# Altium PCB BSPD v3.PcbDoc
Units mm, origin at the board's own origin, x right, y up, seen from the top; angles counter-clockwise.
Board outline 47 x 42 mm, 4 copper layers (Top Layer, 5V, GND, Bottom Layer), stack 0.603 mm thick; 41 components, 25 nets, 121 pads, 35 vias.
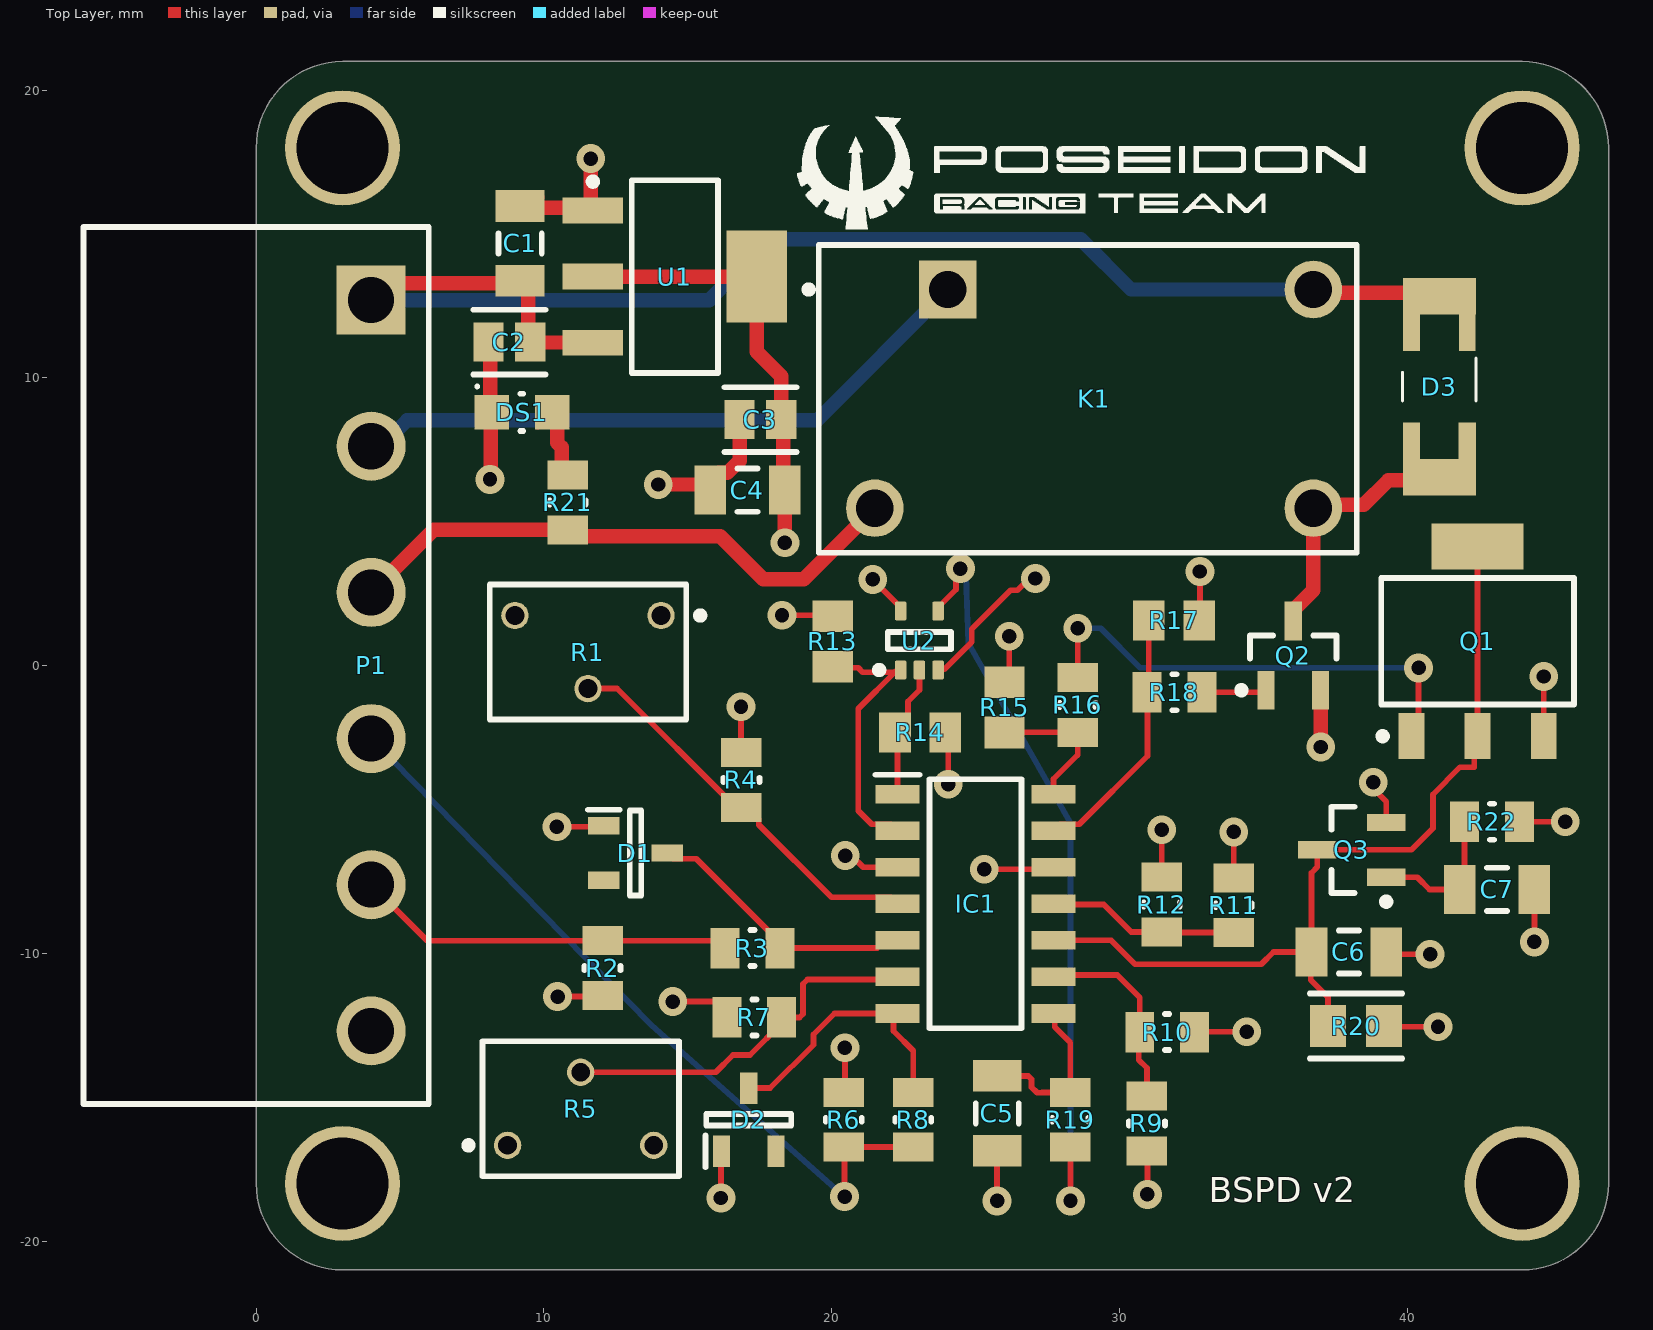
[diagram p0: Top Layer view]
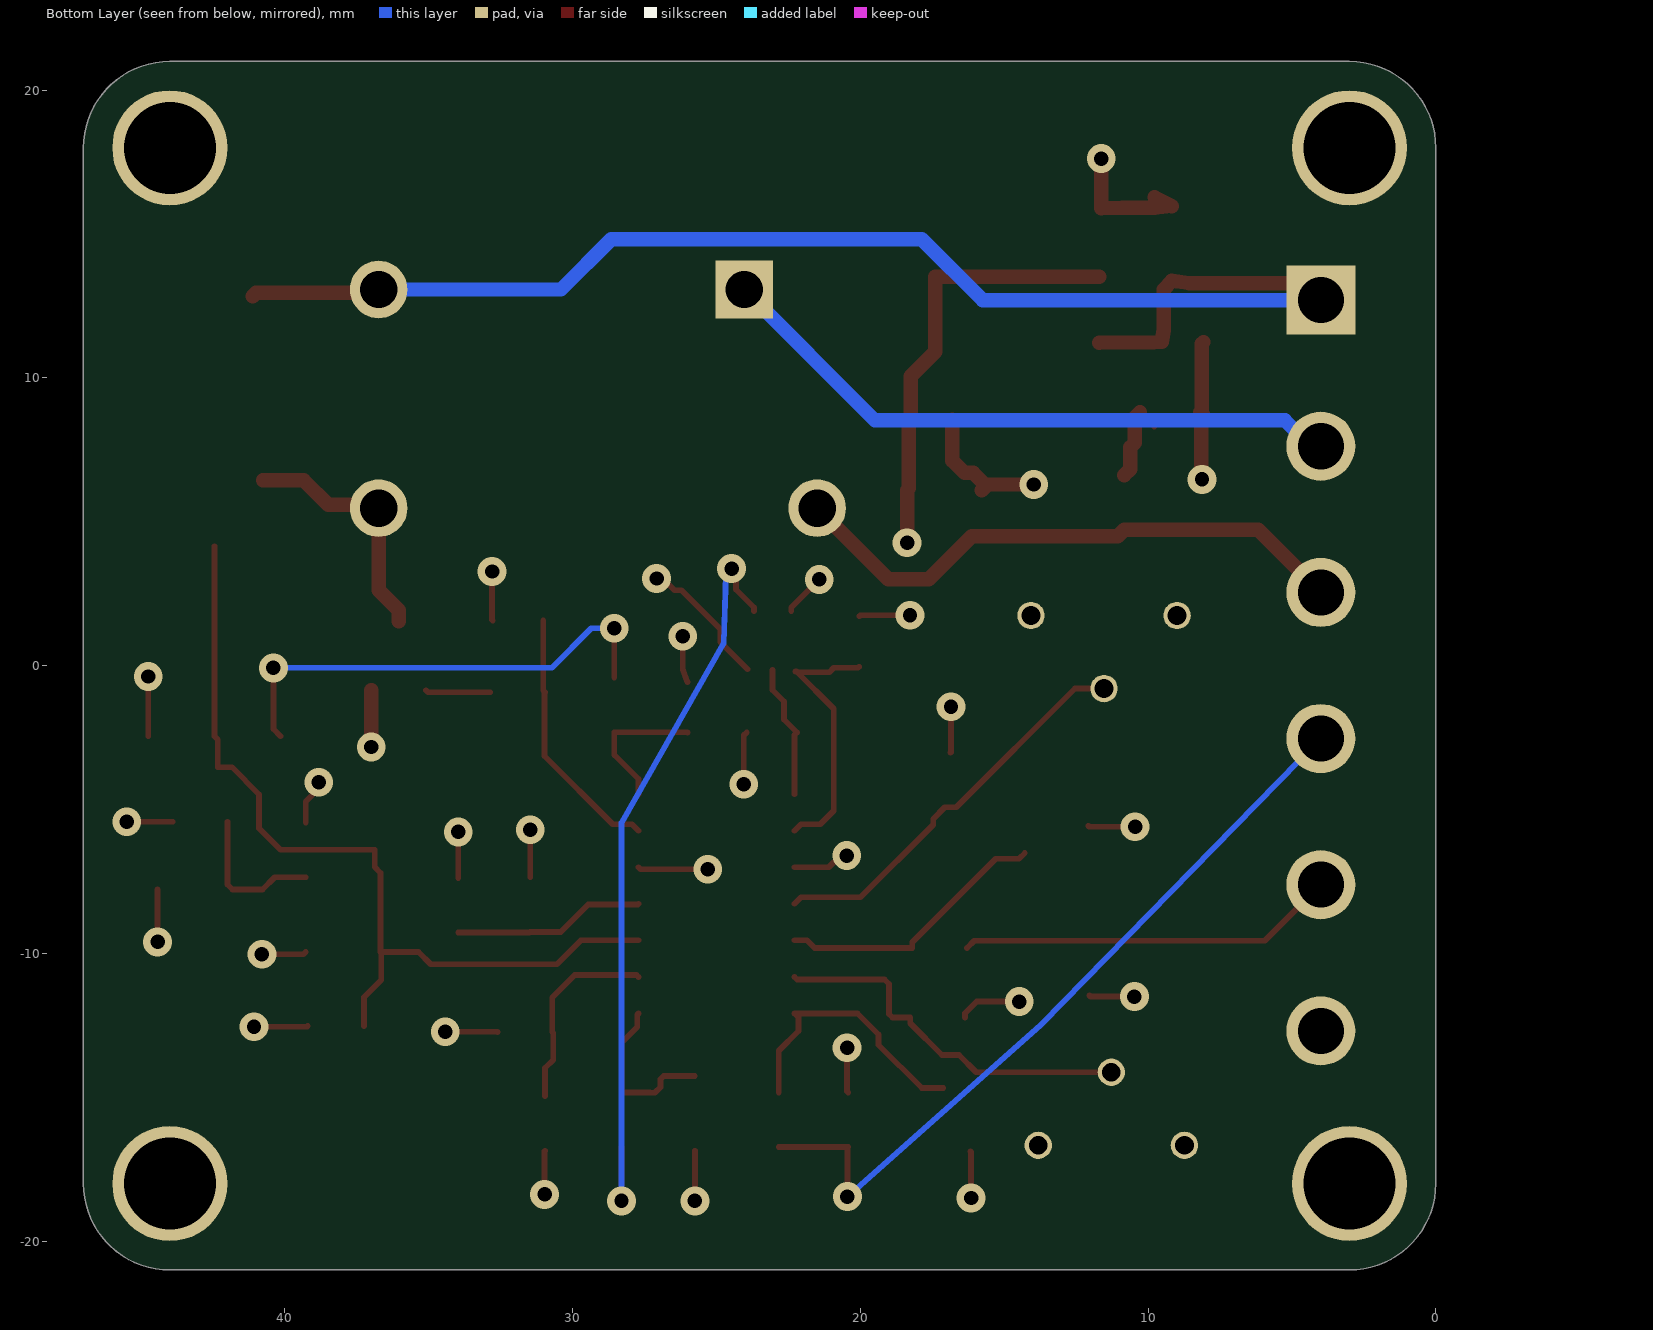
[diagram p1: Bottom Layer view, seen from below]
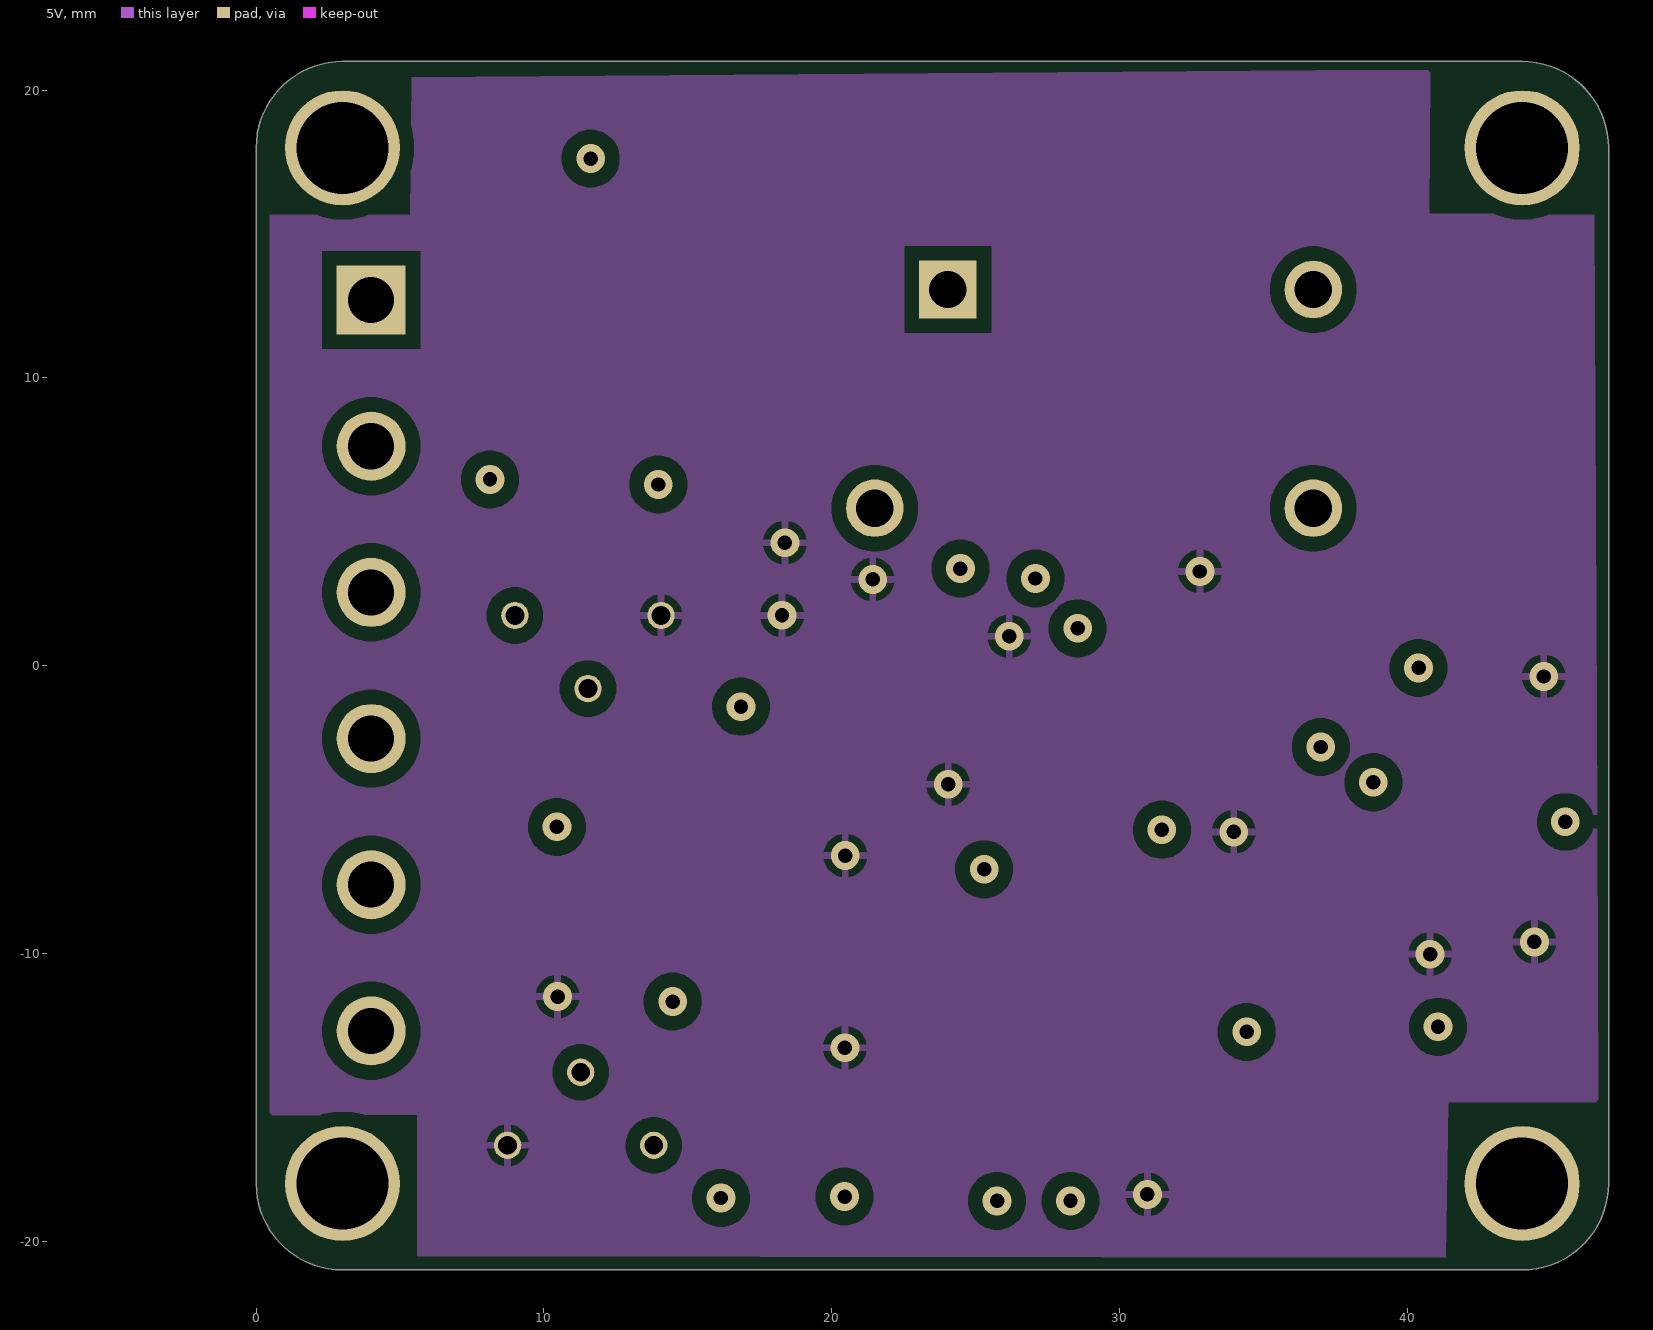
[diagram p2: 5V]
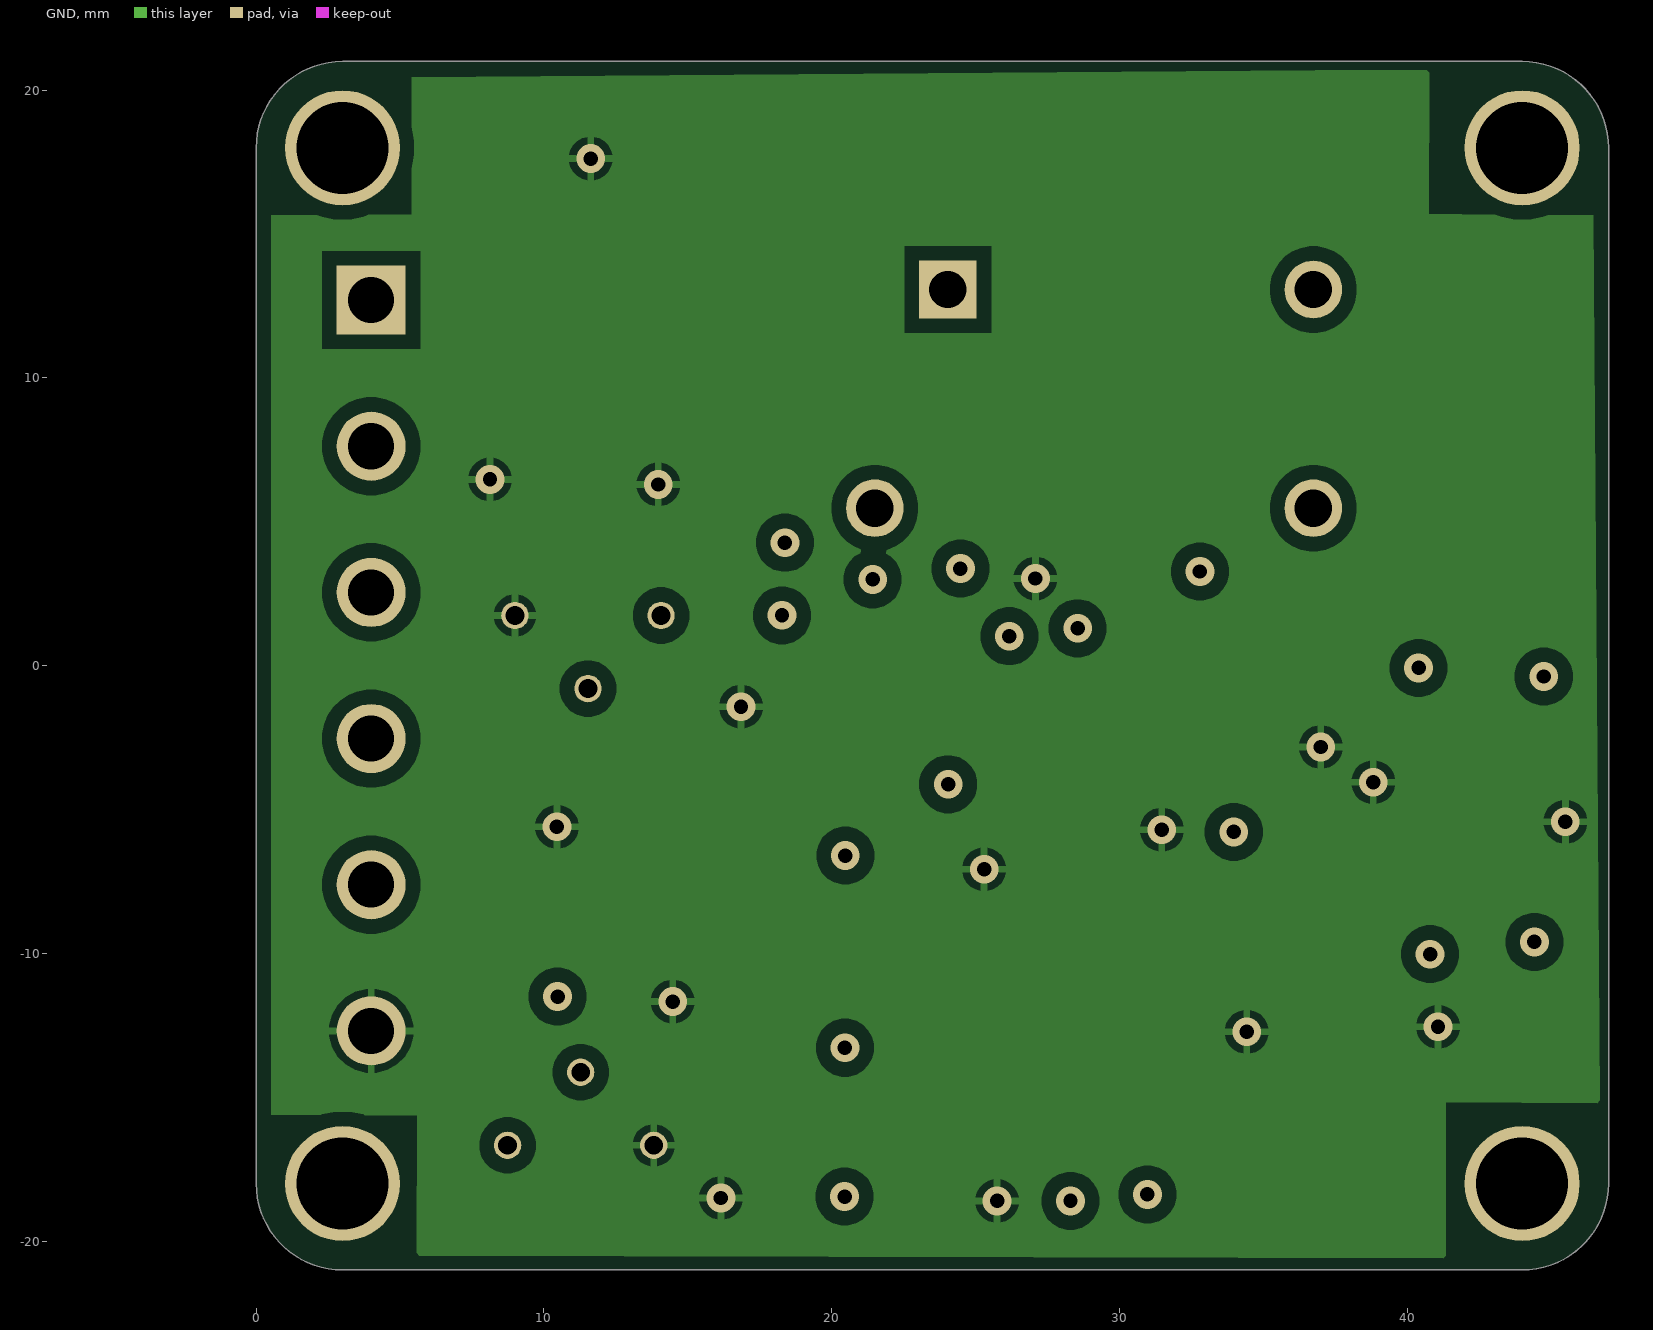
[diagram p3: GND]
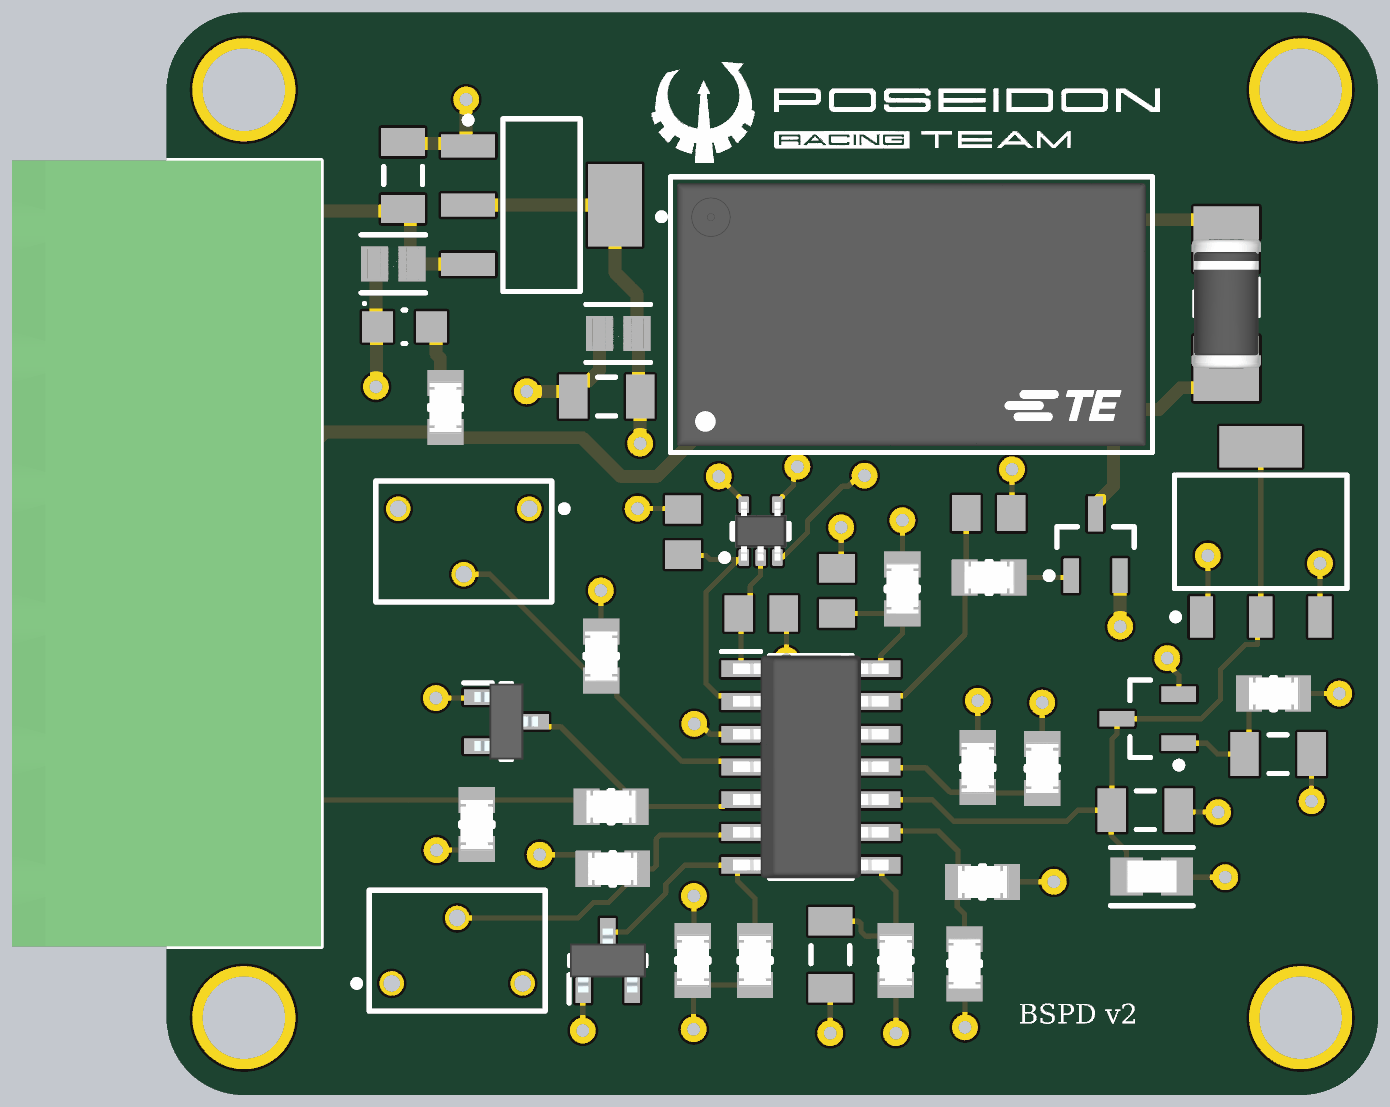
[diagram p4: 3D render of the assembled board from above, using the file's embedded part models]

## Layer stack, top to bottom
Top Solder: solder mask 0.0102, Solder Resist, Dk 3.5
Top Layer: signal copper 0.0356
Dielectric 2: prepreg 0.0711, PP-006, Dk 4.1
5V: signal copper 0.035
Dielectric 1: dielectric 0.32, FR-4, Dk 4.8
GND: signal copper 0.035
Dielectric 3: prepreg 0.0711, PP-006, Dk 4.1
Bottom Layer: signal copper 0.0356
Bottom Solder: solder mask 0.0102, Solder Resist, Dk 3.5

## Board outline
3,-21 cw(c3,-18) 0,-18 0,18 cw(c3,18) 3,21 44,21 cw(c44,18) 47,18 47,-18 cw(c44,-18) 44,-21

## Design rules (kind name [scope] priority, off if disabled: settings)
BoardOutlineClearance [All] p1: gap=0.3 ignorepadtopadclearanceinfootprint=FALSE
Clearance [All] p1: gap=0.5 ignorepadtopadclearanceinfootprint=TRUE
HoleSize [All] p1: absolutevalues=TRUE maxlimit=5 minlimit=0.2 maxpercent=80.000 minpercent=20.000
HoleToHoleClearance [All] p1: gap=0.5 allowstackedmicrovias=TRUE
MinimumAnnularRing [All] p1: minimumring=0.13
PolygonConnect [All] p1: connectstyle=Relief reliefconductorwidth=0.254 reliefentries=4 polygonreliefangle="90 Angle" airgapwidth=0.254
RoutingVias [All] p1: holewidth=0.1 width=0.25 viastyle="Through Hole" minholewidth=0.1 minwidth=0.25 maxholewidth=0.711 maxwidth=1.27
SilkToSilkClearance [All] p1: silktosilkclearance=0.15
SilkToSolderMaskClearance [IsPad] p1: minsilkscreentomaskgap=0.15 clearancetoexposedcopper=TRUE
SolderMaskExpansion [All] p1: expansion=0.102 istentingtop=FALSE
Width [All] p1: maxlimit=0.5 minlimit=0.09 preferedwidth=0.254 toplayer_prefwidth=0.2 midlayer1_maxwidth=0.254 midlayer2_maxwidth=0.254 bottomlayer_prefwidth=0.2 minimp=50.000000 maximp=50.000000 favimp=50.000000
26 further rules are at their usual default settings.

## Components (designator, comment, footprint, x,y, rotation, side; value= is the part's Value field where it differs from the comment)
C1 "C1206C106K8RACTU" CAPC3216X180X50LL20T25 9.175,14.675 r270 top
C2 "CL21B104KBCNNNC" FP-CL21-IPC_C 8.8,11.25 r180 top
C3 "CL21B104KBCNNNC" FP-CL21-IPC_C 17.525,8.55 r180 top
C4 "C1206C106K8RACTU" CAPC3216X180X50LL20T25 17.075,6.1 r0 top
C5 "C1206C106K8RACTU" CAPC3216X180X50LL20T25 25.755,-15.557 r90 top
C6 "C1206C106K8RACTU" CAPC3216X180X50LL20T25 37.975,-9.95 r0 top
C7 "C1206C106K8RACTU" CAPC3216X180X50LL20T25 43.125,-7.775 r0 top
D1 "GSOT05C-E3-08" SOT95P248X115-3N 13.182,-6.51 r0 top
D2 "GSOT05C-E3-08" SOT95P248X115-3N 17.119,-15.781 r90 top
D3 "SM4007-W" SM4007W 41.12,9.7 r270 top
DS1 "LTST-C170KGKT" LTST-LTST-C170KGKT-2_V 9.231,8.805 r0 top
IC1 "LM339M_NOPB" SOIC127P600X175-14N 25,-8.275 r0 top
K1 "T77S1D10-24" FP-T77S1D10-24-MFG 28.9,9.275 r0 top
P1 "691312510006" 691312510006 -0.003,0.008 r270 top
Q1 "BSP171P" INF-PG-SOT223_SC-73_N 42.45,0.85 r90 top
Q2 "2N7002" INF-PG-SOT23_M 36.042,0.348 r90 top
Q3 "2N7002" INF-PG-SOT23_M 38.075,-6.4 r180 top
R1 "3266W-1-104LF" BOUR-3266W-3_V 11.531,0.475 r180 top
R2 "CRCW08052K00FKEA" FP-CRCW0805-e3-IPC_B 12.039,-10.509 r90 top
R3 "CRCW08052K00FKEA" FP-CRCW0805-e3-IPC_B 17.246,-9.812 r0 top
R4 "CRCW08052K00FKEA" FP-CRCW0805-e3-IPC_B 16.865,-3.97 r270 top
R5 "3266W-1-104LF" BOUR-3266W-3_V 11.277,-15.4 r0 top
R6 "CRCW08052K00FKEA" FP-CRCW0805-e3-IPC_B 20.421,-15.781 r90 top
R7 "CRCW08052K00FKEA" FP-CRCW0805-e3-IPC_B 17.311,-12.225 r0 top
R8 "CRCW08052K00FKEA" FP-CRCW0805-e3-IPC_B 22.834,-15.781 r90 top
R9 "CRCW08052K00FKEA" FP-CRCW0805-e3-IPC_B 30.959,-15.908 r270 top
R10 "CRCW08052K00FKEA" FP-CRCW0805-e3-IPC_B 31.659,-12.733 r180 top
R11 "CRCW08052K00FKEA" FP-CRCW0805-e3-IPC_B 33.975,-8.325 r90 top
R12 "CRCW08052K00FKEA" FP-CRCW0805-e3-IPC_B 31.475,-8.3 r270 top
R13 "TNPW08053K00BEEA" RESC2013X55X40NL15T20 20.04,0.842 r90 top
R14 "TNPW08053K00BEEA" RESC2013X55X40NL15T20 23.074,-2.319 r0 top
R15 "TNPW08053K00BEEA" RESC2013X55X40NL15T20 26.009,-1.444 r90 top
R16 "CRCW08052K00FKEA" FP-CRCW0805-e3-IPC_B 28.549,-1.365 r90 top
R17 "TNPW08053K00BEEA" RESC2013X55X40NL15T20 31.9,1.575 r0 top
R18 "CRCW08052K00FKEA" FP-CRCW0805-e3-IPC_B 31.913,-0.922 r0 top
R19 "CRCW08052K00FKEA" FP-CRCW0805-e3-IPC_B 28.295,-15.781 r270 top
R20 "CR0805-JW-125ELF" FP-CR0805-IPC_A 38.225,-12.525 r180 top
R21 "CRCW08052K00FKEA" FP-CRCW0805-e3-IPC_B 10.825,5.675 r270 top
R22 "CRCW08052K00FKEA" FP-CRCW0805-e3-IPC_B 42.95,-5.425 r180 top
U1 "LD1117S50TR" SOT-223_L 14.55,13.525 r0 top
U2 "SN74LVC1G08IDCKREP" DCK0005A_L 23.05,0.875 r90 top

## Footprints (in the part's own frame and the unit in brackets; to place one, negate y for a bottom-side part, rotate by r counter-clockwise, add the part's x,y. Pads: shape width x height; smd on the part's side, far side on the other; paste and mask are expansions set on the pad)
691312510006 [mm] "5,08mm - PCB Headers - Horizontal - Opened ends - 06p"
  rect 2.4x2.4 hole 1.6: 1(-12.7,4)
  round 2.4 hole 1.6: 2(-7.62,4) 3(-2.54,4) 4(2.54,4) 5(7.62,4) 6(12.7,4)
  silkscreen extent -15.24,-6 15.24,6, body extent -15.24,-6 15.24,6, height 8.55
BOUR-3266W-3_V [mm] "THD, 3-Leads, Body 6.6x4.69mm, Pitch 2.54mm"
  round 0.95 hole 0.65: 1(-2.54,-1.27) 2(0,1.27) 3(2.54,-1.27)
  silkscreen extent -4.03,-2.34 3.42,2.34, body extent -3.3,-2.35 3.3,2.35, height 8.51
CAPC3216X180X50LL20T25 [mm] "Chip Capacitor, 2-Leads, Body 3.20x1.60mm, IPC High Density"
  rect 1.1x1.7 smd: 1(-1.3,0) 2(1.3,0)
  silkscreen extent -0.35,-0.75 0.35,0.75, body extent -1.7,-0.9 1.7,0.9, height 1.8
DCK0005A_L [mm] "SOT23, 5-Leads, Body 2.15x1.4mm, Pitch 0.65mm, IPC High Density"
  rrect25% 0.65x0.4 smd: 1(-1.025,0.65) 2(-1.025,0) 3(-1.025,-0.65) 4(1.025,-0.65) 5(1.025,0.65)
  silkscreen extent -1.15,-1.1 0.3,1.52, body extent -1.14,-1 1.14,1, height 0.94
FP-CL21-IPC_C [mm]
  rect 1.055x1.356 smd paste+0 mask+0: 1(-0.726,0) 2(0.726,0)
  silkscreen extent -1.25,-1.12 1.25,1.12, body extent -1.35,-0.82 1.35,0.82, height 0.25
FP-CR0805-IPC_A [mm]
  rect 1.258x1.462 smd paste+0 mask+0: 1(-0.977,0) 2(0.977,0)
  silkscreen extent -1.61,-1.13 1.61,1.13, body extent -2.11,-1.23 2.11,1.23, height 0.25
FP-CRCW0805-e3-IPC_B [mm]
  rect 1.007x1.408 smd paste+0 mask+0: 1(-0.951,0) 2(0.951,0)
  silkscreen extent -0.07,-0.63 0.07,0.63, body extent -1.7,-0.95 1.7,0.95, height 0.25
FP-T77S1D10-24-MFG [mm]
  rect 2x2 hole 1.3 paste-1000 mask+0: 1(-4.86,3.8)
  round 2 hole 1.3 paste-1000 mask+0: 2(7.84,3.8) 3(-7.4,-3.8) 4(7.84,-3.8)
  silkscreen extent -9.82,-5.35 9.35,5.35, body extent -9.45,-5.45 9.45,5.45, height 0.25
INF-PG-SOT23_M [mm] "SOT23, 3-Leads, Body 2.9x1.3mm, Pitch 0.95mm, IPC Low Density"
  rect 1.35x0.6 smd: 1(-1.2,0.95) 2(-1.2,-0.95) 3(1.2,0)
  silkscreen extent -1.32,-1.5 0.7,1.92, body extent -0.7,-1.5 0.7,1.5, height 1.1
INF-PG-SOT223_SC-73_N [mm] "SOT223, 4-Leads, Body 6.5x3.5mm, Pitch 2.3mm, IPC Medium Density"
  rect 1.6x0.9 smd: 1(-3.3,2.3) 2(-3.3,0) 3(-3.3,-2.3)
  rect 1.6x3.2 smd: 4(3.3,0)
  silkscreen extent -3.42,-3.35 2.2,3.42, body extent -1.85,-3.35 1.85,3.35, height 1.8
LTST-LTST-C170KGKT-2_V [mm] "SMD, 2-Leads, Body 2.00x1.25mm"
  rect 1.2x1.2 smd: 1(-1.05,0) 2(1.05,0)
  silkscreen extent -1.6,-0.65 0.05,0.95, body extent -1,-0.63 1,0.63, height 1.1
RESC2013X55X40NL15T20 [mm] "Chip Resistor, 2-Leads, Body 2.00x1.25mm, IPC Medium Density"
  rect 1.1x1.4 smd: 1(-0.875,0) 2(0.875,0)
  body extent -1.07,-0.7 1.08,0.7, height 0.55
SM4007W [mm]
  rect 1.27x2.54 smd: 1(-3.145,0) 2(3.145,0)
  rect 1.27x0.56 smd: 3(-1.875,0.97)
  rect 1.27x0.6 smd: 4(1.875,0.97) 5(-1.875,-0.97) 6(1.875,-0.97)
  silkscreen extent -1,-1.28 0.5,1.28, body extent -2.5,-1.34 2.5,1.34, height 2.7
SOIC127P600X175-14N [mm]
  rect 1.525x0.65 smd: 1(-2.712,3.81) 2(-2.712,2.54) 3(-2.712,1.27) 4(-2.712,0) 5(-2.712,-1.27) 6(-2.712,-2.54) 7(-2.712,-3.81) 8(2.712,-3.81) 9(2.712,-2.54) 10(2.712,-1.27) 11(2.712,0) 12(2.712,1.27) 13(2.712,2.54) 14(2.712,3.81)
  silkscreen extent -3.47,-4.33 1.6,4.48, body extent -3.01,-4.32 3.01,4.34, height 1.75
SOT95P248X115-3N [mm]
  rect 1.1x0.6 smd: 1(-1.1,0.95) 2(-1.1,-0.95) 3(1.1,0)
  silkscreen extent -1.65,-1.48 0.2,1.5, body extent -1.24,-1.48 1.24,1.48, height 1.15
SOT-223_L [mm] "SOT223, 4-Leads, Body 6.5x3.5mm, Pitch 2.3mm, Lead Span 7mm, IPC High Density"
  rect 2.1x0.9 smd: 1(-2.85,2.3) 2(-2.85,0) 3(-2.85,-2.3)
  rect 2.1x3.2 smd: 4(2.85,0)
  silkscreen extent -2.97,-3.35 1.5,3.42, body extent -1.85,-3.35 1.85,3.35, height 1.8

## Part data
C1 C4 C5 C6: library part CMP-2000-06013-1, "Chip Capacitor, 10 uF, +/- 10%, 10 V, -55 to 125 degC, 1206 (3216 Metric), RoHS, Tape and Reel", Capacitance=10uF, Case Code - in=1206, Case Code - mm=3216, Case Height=1.6mm, Case Length=3.2mm, Dielectric=X7R, Manufacturer=Kemet, Maximum Operating Temperature=+125C, Minimum Operating Temperature=-55C, Operating Temperature Range=-55Cto+125C, Package / Case=1206(3216metric), Package Description="2-Pin Surface Mount Device, Body 3.2 x 1.6 mm", Temperature Coefficient / Code=+/-15%, Tolerance=10%, Voltage Rating=10V, Brand=Kemet, Case Width=1.6mm, Class=Class1, Datasheet URL=http://www.kemet.com/docfinder?Partnumber=C1206C106K8RACTU, Datasheet Version=02/2016, Dimensions=1.6mmWx3.2mmLx1.6mmH, Dissipation Factor DF=5, Factory Pack Quantity=2000, Manufacturer URL=http://www.kemet.com/, Mounting Technology=SurfaceMount, Package Reference=1206, Packaging=Reel, Product=GeneralTypeMLCCs, Product Category=MultilayerCeramicCapacitorsMLCC-SMD/SMT, RoHS=Details, Series=C1206C, Termination Style=SMD/SMT, Type=SMDMLCCX7R6.3-250VDCCommericalGrade, Voltage Rating DC=10V
C2 C3: library part CMP-2000-05017-2, "CL21 Series 0805 100nF 50V ±10% Tolerance X7R Multilayer Ceramic Chip Capacitor", Capacitance=100nF, Case Code (Imperial)=0805, Case Code (Metric)=2012, Dielectric=X7R, Max Operating Temperature=125°C, Min Operating Temperature=-55°C, Tolerance=10%, Voltage=50V, Case/Package=0805, Contact Plating=Tin, Depth=1.25mm, Height=0.85mm, Lead Free="Lead Free", Length=2mm, Material=Ceramic, Mount="Surface Mount", Packaging="Tape and Reel", Radiation Hardening=No, Thickness=0.037inch, Voltage Rating=50V, Voltage Rating (DC)=50V, Width=0.049inch
C7: library part CMP-2000-06013-1, "Chip Capacitor, 100 nF, +/- 10%, 10 V, -55 to 125 degC, 1206 (3216 Metric), RoHS, Tape and Reel", Capacitance=10uF, Case Code - in=1206, Case Code - mm=3216, Case Height=1.6mm, Case Length=3.2mm, Dielectric=X7R, Manufacturer=Kemet, Maximum Operating Temperature=+125C, Minimum Operating Temperature=-55C, Operating Temperature Range=-55Cto+125C, Package / Case=1206(3216metric), Package Description="2-Pin Surface Mount Device, Body 3.2 x 1.6 mm", Temperature Coefficient / Code=+/-15%, Tolerance=10%, Voltage Rating=10V, Brand=Kemet, Case Width=1.6mm, Class=Class1, Datasheet URL=http://www.kemet.com/docfinder?Partnumber=C1206C106K8RACTU, Datasheet Version=02/2016, Dimensions=1.6mmWx3.2mmLx1.6mmH, Dissipation Factor DF=5, Factory Pack Quantity=2000, Manufacturer URL=http://www.kemet.com/, Mounting Technology=SurfaceMount, Package Reference=1206, Packaging=Reel, Product=GeneralTypeMLCCs, Product Category=MultilayerCeramicCapacitorsMLCC-SMD/SMT, RoHS=Details, Series=C1206C, Termination Style=SMD/SMT, Type=SMDMLCCX7R6.3-250VDCCommericalGrade, Voltage Rating DC=10V
D1 D2: "Diode ESD (Uni-directional)", Manufacturer_Name=Vishay, Mouser Part Number=78-GSOT05C-E3-08, Arrow Part Number=GSOT05C-E3-08, Arrow Price/Stock=https://www.arrow.com/en/products/gsot05c-e3-08/vishay?region=nac, Datasheet Link=http://www.vishay.com/docs/85824/gsot03c.pdf, Height=1.15mm, Manufacturer_Part_Number=GSOT05C-E3-08, Mouser Price/Stock=https://www.mouser.co.uk/ProductDetail/Vishay-Semiconductors/GSOT05C-E3-08?qs=S660mHfF5o3O8BVbua%252BuVg%3D%3D
D3: "Diode", Manufacturer_Name=Rectron, Mouser Part Number=583-SM4007, Arrow Part Number=SM4007-W, Arrow Price/Stock=https://www.arrow.com/en/products/sm4007-w/rectron?region=nac, Datasheet Link=https://componentsearchengine.com/Datasheets/1/SM4007-W.pdf, Manufacturer_Part_Number=SM4007-W, Mouser Price/Stock=https://www.mouser.co.uk/ProductDetail/Rectron/SM4007-W?qs=Eu63EZxBwKLdRxdF7bUaug%3D%3D
DS1: library part CMP-2000-06620-1, "Ultra Bright AlInGaP Chip LED, 75 mW, -55 to 85 degC, 2-Pin SMD (0805), RoHS, Tape and Reel", Emitting Color=YellowGreen, Forward Current=30mA, Forward Voltage=2.4V, Manufacturer=Lite-On, Operating Temp Range=-55Cto85C, Operating Temperature Classification=Industrial, Package Description="2-Pin Surface Mounted Device, Body 2 x 1.25 mm", Package Reference=LTST-C170KGKT-2, Package Type=ChipLed, Power Dissipation=75W, Power Dissipation Max=75mW, Reverse Voltage=5V, Test Current (It)=20mA, Chip Material=AlGaInP, Datasheet URL=http://optoelectronics.liteon.com/upload/download/DS22-2000-073/S_110_LTST-C170KGKT.pdf, Datasheet Version="Rev. G, 06/2005", DELETED=Compliant, Dominant Wave Length=571nm, Forward Current Max=30mA, High Brightness=Yes, Lens Dimensions=1.4x1.25x0.6mm, Lum Intensity=35mcd, Luminous Intensity=35mcd, Main Category=ChipLED, Manufacturer URL=http://www.us.liteon.com/, Mounting=SurfaceMount, Mounting Technology=SurfaceMount, Number of  Elements=1, Packaging=TapeandReel, Peak Wavelength=574nm, Pin Count=2, Product Depth (mm)=1.25mm, Product Height (mm)=1.1mm, Product Length (mm)=2mm, Rad Hardened=No, Shape Type=Rectangular, Type=Uni-Color, Viewing Angle=130deg
IC1: "Integrated Circuit", Arrow Part Number=LM339M/NOPB, Manufacturer_Name="Texas Instruments", Mouser Part Number=926-LM339M/NOPB, Arrow Price/Stock=https://www.arrow.com/en/products/lm339mnopb/texas-instruments, Datasheet Link=https://www.ti.com/general/docs/suppproductinfo.tsp?distId=10&gotoUrl=http%3A%2F%2Fwww.ti.com%2Flit%2Fgpn%2Flm139-n, Height=1.75mm, Manufacturer_Part_Number=LM339M/NOPB, Mouser Price/Stock=https://www.mouser.co.uk/ProductDetail/Texas-Instruments/LM339M-NOPB?qs=X1J7HmVL2ZHXeViUFGsFqA%3D%3D
K1: library part CMP-03395-000209-1, "RELAY GEN PURPOSE SPST 10A 24V", Coil Current=18.75mA, Coil Power=500mW, Coil Resistance=1.28kR, Coil Voltage (DC)=24V, Contact Current Rating=10A, Contact Voltage Rating (DC)=30V, Max Operating Temperature=85°C, Max Voltage Rating (AC)=250V, Min Operating Temperature=-30°C, Package Quantity=100, Application(s)="GENERAL PURPOSE", Approvals=UL, Coil Type=Non-Latching, Contact Material=Silver, Current Rating=10A, Depth=10.2mm, Height=14.7mm, Length=0.717inch, Max Voltage Rating (DC)=30V, Mount="Through Hole", Number of Pins=4, Operate Time=10ms, Packaging=Tray, Radiation Hardening=No, Relay Type="General Purpose", Release Time=4ms, RoHS Compliant=Yes, Series=T77, Termination=PCB, Throw Configuration=SPST, Voltage Rating (AC)=250V, Weight=9g, Width=0.4inch
P1: library part CMP-1502-02173-1, "Serie 312 - 5.08mm Open Horizontal PCB Header WR-TBL, 6 pin", Manufacturer="Wurth Elektronik", Operating Temperature=-40to105degC, Datasheet URL=http://katalog.we-online.de/em/datasheet/6913125100xx.pdf, Gender=Male, Manufacturer URL=http://www.we-online.de, Mounting Technology=THT, Package Reference=691312510006, Packaging=Box, Part Number=691312510006, Pin Number=6, Pitch=5.08mm, Publisher=WurthElektronik
Q1: library part CMP-1099-00025-1, "P-Channel SIPMOS Small-Signal-Transistor, -60 V VDS, -1.9 A ID, -55 to 150 degC, PG-SOT223 (SC-73), Reel, Green", Manufacturer=Infineon, ComponentLink1Description="Manufacturer URL", ComponentLink1URL=http://www.infineon.com/, ComponentLink2Description=Datasheet, ComponentLink2URL=http://www.infineon.com/dgdl/BSP171P_Rev2.7.pdf?folderId=db3a304314dca38901154a72e3951a65&fileId=db3a30433b47825b013b6004f59a57fa, ComponentLink3Description="Package Specification", ComponentLink3URL=http://www.infineon.com/dgdl/SOT223-Package_Overview.pdf?folderId=db3a30431936bc4b0119530470b03c3d&fileId=db3a30431936bc4b0119531d40b93c5c, DatasheetVersion="Rev. 2.7", Green=TRUE, Halogen-free=TRUE, ID (max)="-1.9Â A", IDpuls (max)="-7.6Â A", Mode=Enhancement, Mounting Technology="Surface Mount", PackageDescription="4-Pin Small Outline Transistor Package, 6.5 x 3.5 mm Body, 2.3 mm Pitch", PackageReference="PG-SOT223 (SC-73)", PackageVersion=Apr-08, Packing=Reel, PartNumber=BSP171P, Polarity=P, Pto t (max)="1.8Â W", QG="-13Â nC", RDS (on) (max)="300Â mOhm", Rth="110Â K/W", Technology=SIPMOS, VDS (max)="-60Â V", VGS(th) (max)="-2Â V", VGS(th) (min)="-1Â V"
Q2 Q3: library part CMP-1149-00026-1, "N-Channel OptiMOS Small-Signal-Transistor, 60 V VDS, 0.3 A ID, -55 to 150 degC, PG-SOT23, Reel, Green", Manufacturer=Infineon, ComponentLink1Description="Manufacturer URL", ComponentLink1URL=http://www.infineon.com/, ComponentLink2Description=Datasheet, ComponentLink2URL=http://www.infineon.com/dgdl/2N7002_Rev2.4.pdf?folderId=db3a3043156fd573011622e10b5c1f67&fileId=db3a304319bc939a0119c2a9461e79e6, ComponentLink3Description="Package Specification", ComponentLink3URL=http://www.infineon.com/dgdl/SOT23-Package_Overview.pdf?folderId=db3a30431936bc4b0119532290053c66&fileId=db3a30431936bc4b0119533468123c85, DatasheetVersion="Rev. 2.4", Green=TRUE, Halogen-free=TRUE, ID (max)="0.3Â A", IDpuls (max)="1.2Â A", Mounting Technology="Surface Mount", PackageDescription="3-Pin Small Outline Transistor Package, 2.9 x 1.3 mm Body, 0.95 mm Pitch", PackageReference=PG-SOT23, PackageVersion=Apr-08, Packing=Reel, PartNumber=2N7002, Ptot (max)="0.5Â W", QG="0.4Â nC", RDS (on) (max)="3,000 mOhm", RDS (on) (max) (@4.5V)="4,000 mOhm", RthJA (max)="250 K/W", VDS (max)="60 V", VGS(th) (max)="2.5Â V", VGS(th) (min)="1.5Â V"
R1 R5: library part CMP-0975-00021-1, "Square Trimpot Trimming Potentiometer, 100 KOhm, 0.25 W, -55 to 125 degC, 3-Pin THD, RoHS, Tube", Manufacturer=Bourns, Operating Temperature="-55 to 125 degC", Power Rating@70 degC="0.25 W", Resistance="100 kOhm", Tolerance=+/-10%, ComponentLink1Description="Manufacturer URL", ComponentLink1URL=https://www.bourns.com/, ComponentLink2Description=Datasheet, ComponentLink2URL=https://www.bourns.com/data/global/pdfs/3266.pdf, ComponentLink3Description="Package Specification", ComponentLink3URL=https://www.bourns.com/data/global/pdfs/3266.pdf, DatasheetVersion=Apr-14, Mounting Technology="Through Hole", PackageDescription="3-Pin THD, Body 6.35 x 4.31 mm, Pitch 2.54 mm", Packing=Tube, PartNumber=3266W-1-104LF, RoHS=TRUE
R2 R6 R10: library part CMP-2001-03755-2, "RES Thick Film, 100kΩ, 1%, 0.125W, 100ppm/°C, 0805", Case Code (Imperial)=0805, Case Code (Metric)=2012, Max Operating Temperature=155°C, Max Power Dissipation=125mW, Min Operating Temperature=-55°C, Package Quantity=10, Resistance=2kR, Temperature Coefficient=100ppm/°C, Tolerance=1%, Voltage Rating=150V, Case/Package=0805, Composition="Thick Film", Contact Plating=Tin, Depth=1.25mm, Features="Automotive AEC-Q200", Height=0.02inch, Lead Free="Lead Free", Length=2mm, Military Standard=Not, Mount="Surface Mount", Number of Pins=2, Number of Terminals=2, Number of Terminations=2, Packaging="Tape and Reel", Power Rating=125mW, Radiation Hardening=No, Termination=SMD/SMT, Voltage Rating (DC)=150V, Weight=0.000194oz, Width=1.25mm, Working Voltage=150V
R3 R4 R7 R8 R12: library part CMP-2001-03755-2, "RES Thick Film, 10kΩ, 1%, 0.125W, 100ppm/°C, 0805", Case Code (Imperial)=0805, Case Code (Metric)=2012, Max Operating Temperature=155°C, Max Power Dissipation=125mW, Min Operating Temperature=-55°C, Package Quantity=10, Resistance=2kR, Temperature Coefficient=100ppm/°C, Tolerance=1%, Voltage Rating=150V, Case/Package=0805, Composition="Thick Film", Contact Plating=Tin, Depth=1.25mm, Features="Automotive AEC-Q200", Height=0.02inch, Lead Free="Lead Free", Length=2mm, Military Standard=Not, Mount="Surface Mount", Number of Pins=2, Number of Terminals=2, Number of Terminations=2, Packaging="Tape and Reel", Power Rating=125mW, Radiation Hardening=No, Termination=SMD/SMT, Voltage Rating (DC)=150V, Weight=0.000194oz, Width=1.25mm, Working Voltage=150V
R9 R11 R19: library part CMP-2001-03755-2, "RES Thick Film, 39kΩ, 1%, 0.125W, 100ppm/°C, 0805", Case Code (Imperial)=0805, Case Code (Metric)=2012, Max Operating Temperature=155°C, Max Power Dissipation=125mW, Min Operating Temperature=-55°C, Package Quantity=10, Resistance=2kR, Temperature Coefficient=100ppm/°C, Tolerance=1%, Voltage Rating=150V, Case/Package=0805, Composition="Thick Film", Contact Plating=Tin, Depth=1.25mm, Features="Automotive AEC-Q200", Height=0.02inch, Lead Free="Lead Free", Length=2mm, Military Standard=Not, Mount="Surface Mount", Number of Pins=2, Number of Terminals=2, Number of Terminations=2, Packaging="Tape and Reel", Power Rating=125mW, Radiation Hardening=No, Termination=SMD/SMT, Voltage Rating (DC)=150V, Weight=0.000194oz, Width=1.25mm, Working Voltage=150V
R13 R14 R15 R17: library part CMP-2001-04767-1, Manufacturer="Vishay Dale", Part Number=TNPW08053K00BEEA
R16 R18: library part CMP-2001-03755-2, "RES Thick Film, 100Ω, 1%, 0.125W, 100ppm/°C, 0805", Case Code (Imperial)=0805, Case Code (Metric)=2012, Max Operating Temperature=155°C, Max Power Dissipation=125mW, Min Operating Temperature=-55°C, Package Quantity=10, Resistance=2kR, Temperature Coefficient=100ppm/°C, Tolerance=1%, Voltage Rating=150V, Case/Package=0805, Composition="Thick Film", Contact Plating=Tin, Depth=1.25mm, Features="Automotive AEC-Q200", Height=0.02inch, Lead Free="Lead Free", Length=2mm, Military Standard=Not, Mount="Surface Mount", Number of Pins=2, Number of Terminals=2, Number of Terminations=2, Packaging="Tape and Reel", Power Rating=125mW, Radiation Hardening=No, Termination=SMD/SMT, Voltage Rating (DC)=150V, Weight=0.000194oz, Width=1.25mm, Working Voltage=150V
R20: library part CMP-1013-00148-2, "Thick Film Chip Resistors 0805 1.2MΩ 0.125W 5% 200ppm/°C", Case Code (Imperial)=0805, Case Code (Metric)=2012, Max Operating Temperature=155°C, Max Power Dissipation=125mW, Min Operating Temperature=-55°C, Package Quantity=5000, Resistance=1.2MR, Temperature Coefficient=200ppm/°C, Tolerance=5%, Voltage Rating=150V, Case/Package=0805, Composition="Thick Film", Contact Plating=Tin, Depth=1.25mm, Features="Moisture Resistant", Height=0.024inch, Length=2mm, Military Standard=Not, Mount="Surface Mount", Number of Terminations=2, Packaging="Tape and Reel", Power Rating=125mW, Radiation Hardening=No, Termination=SMD/SMT, Thickness=508um, Width=1.25mm
R21: library part CMP-2001-03755-2, "RES Thick Film, 360Ω, 1%, 0.125W, 100ppm/°C, 0805", Case Code (Imperial)=0805, Case Code (Metric)=2012, Max Operating Temperature=155°C, Max Power Dissipation=125mW, Min Operating Temperature=-55°C, Package Quantity=10, Resistance=2kR, Temperature Coefficient=100ppm/°C, Tolerance=1%, Voltage Rating=150V, Case/Package=0805, Composition="Thick Film", Contact Plating=Tin, Depth=1.25mm, Features="Automotive AEC-Q200", Height=0.02inch, Lead Free="Lead Free", Length=2mm, Military Standard=Not, Mount="Surface Mount", Number of Pins=2, Number of Terminals=2, Number of Terminations=2, Packaging="Tape and Reel", Power Rating=125mW, Radiation Hardening=No, Termination=SMD/SMT, Voltage Rating (DC)=150V, Weight=0.000194oz, Width=1.25mm, Working Voltage=150V
R22: library part CMP-2001-03755-2, "RES Thick Film, 560kΩ, 1%, 0.125W, 100ppm/°C, 0805", Case Code (Imperial)=0805, Case Code (Metric)=2012, Max Operating Temperature=155°C, Max Power Dissipation=125mW, Min Operating Temperature=-55°C, Package Quantity=10, Resistance=2kR, Temperature Coefficient=100ppm/°C, Tolerance=1%, Voltage Rating=150V, Case/Package=0805, Composition="Thick Film", Contact Plating=Tin, Depth=1.25mm, Features="Automotive AEC-Q200", Height=0.02inch, Lead Free="Lead Free", Length=2mm, Military Standard=Not, Mount="Surface Mount", Number of Pins=2, Number of Terminals=2, Number of Terminations=2, Packaging="Tape and Reel", Power Rating=125mW, Radiation Hardening=No, Termination=SMD/SMT, Voltage Rating (DC)=150V, Weight=0.000194oz, Width=1.25mm, Working Voltage=150V
U1: library part CMP-0244-00312-1, "Fixed Low Drop Positive Voltage Regulator, 5V, 4-Pin SOT-223, Tape and Reel", ComponentLink1Description="Manufacturer URL", ComponentLink1URL=http://www.st.com, ComponentLink2Description=Datasheet, ComponentLink2URL=http://www.st.com/internet/com/TECHNICAL_RESOURCES/TECHNICAL_LITERATURE/DATASHEET/CD00000544.pdf, DatasheetVersion=1/11/2011, PackageDescription="4-Pin SOT-223 Package, 6.5 x 3.5 mm Body, 2.3 mm Pitch, 7 mm Lead Span", PackageReference=SOT-223, PackageVersion=2010
U2: library part CMP-0859-00273-3, "Enhanced Product Single 2-Input Positive-And Gate, DCK0005A, LARGE T&R", F @ Nom Voltage(Max)(Mhz)=150, Generic Part Number=SN74LVC1G08-EP, ICC @ Nom Voltage(Max)(mA)=0.01, Manufacturer="Texas Instruments", Operating Temperature Range(C)="-40 to 85,-55 to 125", Rating="HiRel Enhanced Product", tpd @ Nom Voltage(Max)(ns)=8,5.5,4.5,4, Voltage(Nom)(V)=1.8,2.5,3.3,5, 3-State Output=No, Bits(#)=1, DatasheetVersion=SCES454C, Gate Type=AND, Input Type=CMOS/TTL, Logic=True, Output Drive (IOL/IOH)(Max)(mA)=32/-32, Output Type=CMOS, PackageReference=DCK0005A, Schmitt Trigger=No, Sub-Family="AND Gate", Technology Family=LVC, VCC(Max)(V)=5.5, VCC(Min)(V)=1.65

## Free pads (board coordinates)
  round 4 hole 3.2: 18(3,18) 19(3,-18) 19(44,-18) 19(44,18)

## Via types
v1: diameter 1, hole 0.5, Top Layer to Bottom Layer, 34 vias
v2: diameter 1, hole 0.51, Top Layer to Bottom Layer, 1 vias

## Nets (pads, with @x,y where several pads share a name; then routed paths per layer and width w, separated by ;. In a path a pad name is that pad's centre, name@x,y a point inside that pad or via, vN(x,y) a via of type N, cw(c..) or ccw(c..) an arc to the next point about the centre after c; other vN are vias at no path point)
+5: C3.1 C4.2 C6.2 C7.2 IC1.3 Q1.3 R1.1 R2.1 R5.1 R6.2 R9.2 R11.2 R13.2 R14.2 R15.2 R17.2 U1.2 U1.4 U2.5 | length 37.5
  Top Layer w0.2: v1(10.475,-11.5) 11.999,-11.5 R2.1 ; v1(18.275,1.75) 20.007,1.75 R13.2 ; R6.2 20.461,-14.791 v1(20.461,-13.278) ; v1(20.475,-6.6) 20.691,-6.6 21.096,-7.005 IC1.3 ; v1(21.425,3) 22.4,2.025 U2.5 ; R14.2 24.05,-2.42 v1(24.05,-4.121) ; R15.2 26.175,-0.119 v1(26.175,1.025) ; R9.2 30.975,-16.875 v1(30.975,-18.375) ; R17.2 32.8,1.6 v1(32.8,3.275) ; R11.2 v1(33.975,-5.775) ; C6.2 39.35,-10.025 v1(40.8,-10.025) ; v1(44.425,-9.6) C7.2 ; Q1.3 v1(44.75,-0.375)
  Top Layer w0.5: U1.2 U1.4 17.4,10.915 18.251,10.064 C3.1 18.313,8.488 18.313,6.162 C4.2 v1(18.375,4.275)
+12: C1.2 C2.1 D3.1 K1.2 P1.1 U1.3 | length 48.6
  Top Layer w0.5: P1.1 4.947,13.298 8.575,13.298 C1.2 9.455,13.075 9.455,11.678 C2.1 9.803,11.234 10.9,11.234 U1.3 ; K1.2 36.855,12.96 41.005,12.96 D3.1
  Bottom Layer w0.5: P1.1 15.743,12.708 17.86,14.825 28.657,14.825 30.407,13.075 K1.2
BrakeSensor: P1.5 R2.2 R3.1 | length 13.2
  Top Layer w0.2: P1.5 5.943,-9.558 R2.2 16.041,-9.558 R3.1
COM: K1.1 P1.2 | length 22.3
  Bottom Layer w0.5: P1.2 4.343,7.628 5.24,8.525 19.49,8.525 K1.1
GND: C1.1 C2.2 C3.2 C4.1 C5.1 D1.1 D2.1 DS1.1 IC1.12 P1.6 Q2.2 Q3.2 R1.3 R4.1 R5.3 R7.1 R10.1 R12.1 R20.1 R22.1 U1.1 U2.3 | length 40.7
  Top Layer w0.2: v1(10.45,-5.6) 12.042,-5.6 D1.1 ; v1(14.475,-11.675) 15.957,-11.675 16.36,-12.078 R7.1 ; v1(16.15,-18.5) 16.15,-16.9 D2.1 ; v1(16.85,-1.425) 16.85,-3.004 R4.1 ; 23.925,-0.125 24.872,0.822 24.872,1.278 26.216,2.622 26.457,2.622 26.865,3.03 v1(27.081,3.03) ; v1(25.3,-7.075) 27.642,-7.075 IC1.12 ; v1(25.75,-18.6) 25.75,-16.862 C5.1 ; R12.1 v1(31.475,-5.7) ; R10.1 32.618,-12.725 v1(34.425,-12.725) ; v1(38.825,-4.05) 38.825,-4.266 39.275,-4.716 Q3.2 ; R20.1 39.227,-12.55 v1(41.075,-12.55) ; R22.1 v1(45.5,-5.425)
  Top Layer w0.5: DS1.1@8.074,8.698 8.153,8.619 8.153,6.503 v1(8.125,6.475) ; C2.2 8.128,11.197 8.128,8.858 DS1.1 ; C1.1@9.775,16.275 C1.1 9.775,15.922 10.9,15.922 11.625,15.9 v2(11.625,17.625) ; v1(13.975,6.3) 15.575,6.3 C4.1 ; C4.1@15.775,6.4 16.075,6.7 16.375,6.7 16.799,7.124 C3.2 ; Q2.2 36.996,-0.856 36.996,-2.821 v1(37,-2.825)
IN_1_+: D1.3 IC1.5 R3.2 | length 9.6
  Top Layer w0.2: D1.3 14.482,-6.71 15.296,-6.71 18.197,-9.611 R3.2 21.584,-9.812 21.85,-9.545 IC1.5
IN_1_-: IC1.4 R1.2 R4.2 | length 14
  Top Layer w0.2: R1.2 12.538,-0.795 16.664,-4.921 17.066,-4.921 17.469,-5.324 17.469,-5.525 19.994,-8.05 22.063,-8.05 IC1.4
IN_2_+: D2.3 IC1.7 R8.2 | length 9.5
  Top Layer w0.2: D2.3 17.862,-14.681 19.365,-13.178 19.365,-12.818 20.098,-12.085 IC1.7 22.15,-12.223 22.15,-12.7 22.834,-13.384 R8.2
IN_2_-: IC1.6 R5.2 R7.2 | length 13.1
  Top Layer w0.2: R5.2 15.971,-14.13 16.572,-13.529 17.159,-13.529 18.262,-12.426 R7.2 18.883,-12.225 19,-12.108 19,-11.065 19.157,-10.907 22.196,-10.907 IC1.6
IN_3_+: IC1.9 R9.1 R10.2 | length 6.9
  Top Layer w0.2: IC1.9 27.777,-10.75 29.928,-10.75 30.708,-11.53 R10.2 30.675,-12.766 30.675,-13.7 30.959,-13.984 R9.1
IN_3_-: C5.2 IC1.8 R19.1 | length 5.9
  Top Layer w0.2: C5.2 26.833,-14.257 26.95,-14.374 26.95,-14.65 27.142,-14.842 27.308,-14.842 27.32,-14.83 R19.1 28.295,-13.095 27.75,-12.55 27.75,-12.123 IC1.8
IN_4_+: IC1.11 R11.1 R12.2 | length 6.7
  Top Layer w0.2: IC1.11 27.737,-8.3 29.458,-8.3 30.409,-9.251 R12.2 31.5,-9.276 R11.1
IN_4_-: C6.1 IC1.10 Q1.2 Q1.4 Q3.3 R20.2 | length 31
  Top Layer w0.2: IC1.10 29.713,-9.545 30.547,-10.379 34.928,-10.379 35.357,-9.95 C6.1 ; R20.2 37.248,-11.523 36.65,-10.925 36.65,-9.975 C6.1 ; Q1.4 Q1.2 42.333,-2.567 42.333,-3.525 41.843,-3.525 40.896,-4.472 40.896,-5.653 40.149,-6.4 Q3.3 36.875,-7 36.675,-7.2 C6.1
NetC7_1: C7.1 Q3.1 R22.2 | length 5.1
  Top Layer w0.2: Q3.1 40.35,-7.35 40.775,-7.775 C7.1 41.999,-7.601 R22.2
NetD3_2: D3.2 K1.4 Q2.3 | length 8.6
  Top Layer w0.5: Q2.3 36.042,1.923 36.74,2.621 K1.4 36.855,5.59 38.49,5.59 39.34,6.44 D3.2@40.761,6.44
NetDS1_2: DS1.2 R21.1 | length 3.1
  Top Layer w0.2: DS1.2@9.781,8.305 DS1.2
  Top Layer w0.5: DS1.2 10.459,8.627 10.459,7.748 10.621,7.586 10.621,6.83 R21.1
NetQ1_1: Q1.1 R16.2 | length 16.6
  Top Layer w0.2: R16.2 28.55,-0.413 v1(28.55,1.3) ; Q1.1 40.4,-2.2 v1(40.4,-0.075)
  Bottom Layer w0.2: v1(28.55,1.3) 29.35,1.3 30.725,-0.075 v1(40.4,-0.075)
NetQ2_1: Q2.1 R18.2 | length 2.3
  Top Layer w0.2: R18.2 35.022,-0.922 Q2.1
NetR19_2: R19.2 U2.4 | length 26.7
  Top Layer w0.2: U2.4 23.7,2.025 24.322,2.647 24.322,3.222 v1(24.475,3.375) ; R19.2 28.3,-16.737 v1(28.3,-18.6)
  Bottom Layer w0.2: v1(24.475,3.375) 24.614,3.245 24.672,3.186 24.75,0.775 28.3,-5.46 v1(28.3,-18.6)
NO: K1.3 P1.3 R21.2 | length 20.1
  Top Layer w0.5: P1.3 6.173,4.724 R21.2 11.049,4.5 16.125,4.5 17.625,3 19.025,3 K1.3
OUT_1: IC1.2 R13.1 U2.1 | length 9.3
  Top Layer w0.2: R13.1 20.08,-0.073 20.923,-0.073 21.075,-0.225 22.175,-0.225 ; U2.1@22.25,-0.2 22.219,-0.2 20.926,-1.494 20.926,-5.039 21.397,-5.51 22.063,-5.51 IC1.2
OUT_2: IC1.1 R14.1 U2.2 | length 4.7
  Top Layer w0.2: IC1.1 22.288,-2.408 R14.1 22.649,-1.869 22.649,-1.245 23.05,-0.844 U2.2
OUT_3: IC1.14 R15.1 R16.1 | length 5
  Top Layer w0.2: R15.1 26.012,-2.316 R16.1 28.549,-3.101 27.712,-3.938 IC1.14
OUT_4: IC1.13 R17.1 R18.1 | length 9.1
  Top Layer w0.2: IC1.13 27.937,-5.51 28.603,-5.51 30.975,-3.138 30.975,-0.935 R18.1 31.025,-0.859 R17.1
TPS: P1.4 R6.1 R8.1 | length 27
  Top Layer w0.2: v1(20.45,-18.45) 20.45,-16.761 R6.1 R8.1
  Bottom Layer w0.2: P1.4 13.688,-12.444 ccw(c14.475,-11.675) 13.745,-12.498 v1(20.45,-18.45)
pads on no net: D1.2 D2.2 D3.3 D3.4 D3.5 D3.6

## Polygon pours and split planes (outlines as drawn)
GND on GND "GND_L03_P007" (solid, pour order 7): 0.525,-15.6 5.6,-15.625 5.575,-20.5 41.35,-20.6 41.35,-15.175 46.7,-15.2 46.475,15.65 40.75,15.7 40.775,20.725 5.4,20.45 5.4,15.675 0.525,15.65
+5 on 5V "+5_L02_P006" (solid, pour order 6): 0.475,-15.625 5.6,-15.6 5.6,-20.525 41.35,-20.575 41.425,-15.175 46.65,-15.175 46.5,15.675 40.775,15.725 40.8,20.725 5.4,20.45 5.35,15.675 0.475,15.675

## Silkscreen, mask and mechanical layers (free items; w line width, h text height)
Top Overlay:
  drawing of 16 lines, arcs and shapes, not listed
  text "BSPD v2" at 33.1,-18.95 h1.5
Mechanical 1:
  the board outline again, w0.254